# EAGLE board Layout (EAGLE 7.7.0)

Size 160 x 100 mm. Coordinates in mm from the lower left corner, seen from the top.
Outline: 30.48,47.62 30.48,15.88
Outline: 46.35,31.75 14.61,31.75
Outline: 0,0 160,0 160,100 0,100 0,0
Outline: circle at 30.48,31.75 radius 16
Copper layers (1*16): Top 0.035mm / dielectric 1.5mm / Bottom 0.035mm
Design rules "default": minimum track width 10mil, minimum drill 24mil, track to track 8mil, track to pad 8mil, pad to pad 8mil, via to via 8mil, smd to smd 8mil, copper to edge 40mil, drill to drill 8mil, minimum pad ring 10mil, minimum via ring 8mil, stop-mask expansion 4mil, vias tented up to drill 0mil, thermal gap 10mil
Holes 3.2 mm at 30.48,19.05 30.48,44.45

## Footprints (pad centres in the part's own frame; a part is rotated, then mirrored left to right if it is on the bottom)
CR2032-SMD = smd 2.54 x 5.08: +$1 -11.43,0; +$2 11.43,0 | smd 4.064 x 4.064: - 0,0
SO08 = smd 0.61 x 2.21: 1 -1.905,-2.616; 2 -0.635,-2.616; 3 0.635,-2.616; 4 1.905,-2.616; 5 1.905,2.616; 6 0.635,2.616; 7 -0.635,2.616; 8 -1.905,2.616
SO08-GW = smd 0.762 x 2.21: 1 -3.81,-4.318; 2 -1.27,-4.318; 3 1.27,-4.318; 4 3.81,-4.318; 5 3.81,4.318; 6 1.27,4.318; 7 -1.27,4.318; 8 -3.81,4.318

## Placement (x,y rotation side)
U1  [CR2032-SMD]  30.48,31.75 0 bottom
U$1  TINY138S2  [SO08]  30.48,31.75 270 top
U$2  TINY13S8S1  [SO08-GW]  30.48,31.75 0 top

## Library data of the parts
U1 = cr2032
U$1 U$2 = Atmel - µController

## Nets
AGND: U1.- U$1.4 U$2.4
PORTB.0: U$1.5 U$2.5
PORTB.1: U$1.6 U$2.6
PORTB.2: U$1.7 U$2.7
PORTB.3: U$1.2 U$2.2
PORTB.4: U$1.3 U$2.3
PORTB.5: U$1.1 U$2.1
VCC: U1.+$1 U1.+$2 U$1.8 U$2.8

## Tracks (layer width: path | path; a pad name or v marks a point on that pad's centre or on a via)
AGND  (2 unrouted)
PORTB.0  (1 unrouted)
PORTB.1  (1 unrouted)
PORTB.2  (1 unrouted)
PORTB.3  (1 unrouted)
PORTB.4  (1 unrouted)
PORTB.5  (1 unrouted)
VCC  (3 unrouted)